# Altium PCB Q1_STM32_Buck.PcbDoc
Units mm, origin at the board's own origin, x right, y up, seen from the top; angles counter-clockwise.
Board outline 59 x 35 mm, 4 copper layers (Top Layer, Int1 (GND), Int2 (GND), Bottom Layer), stack 1.369 mm thick; 39 components, 22 nets, 158 pads, 34 vias.
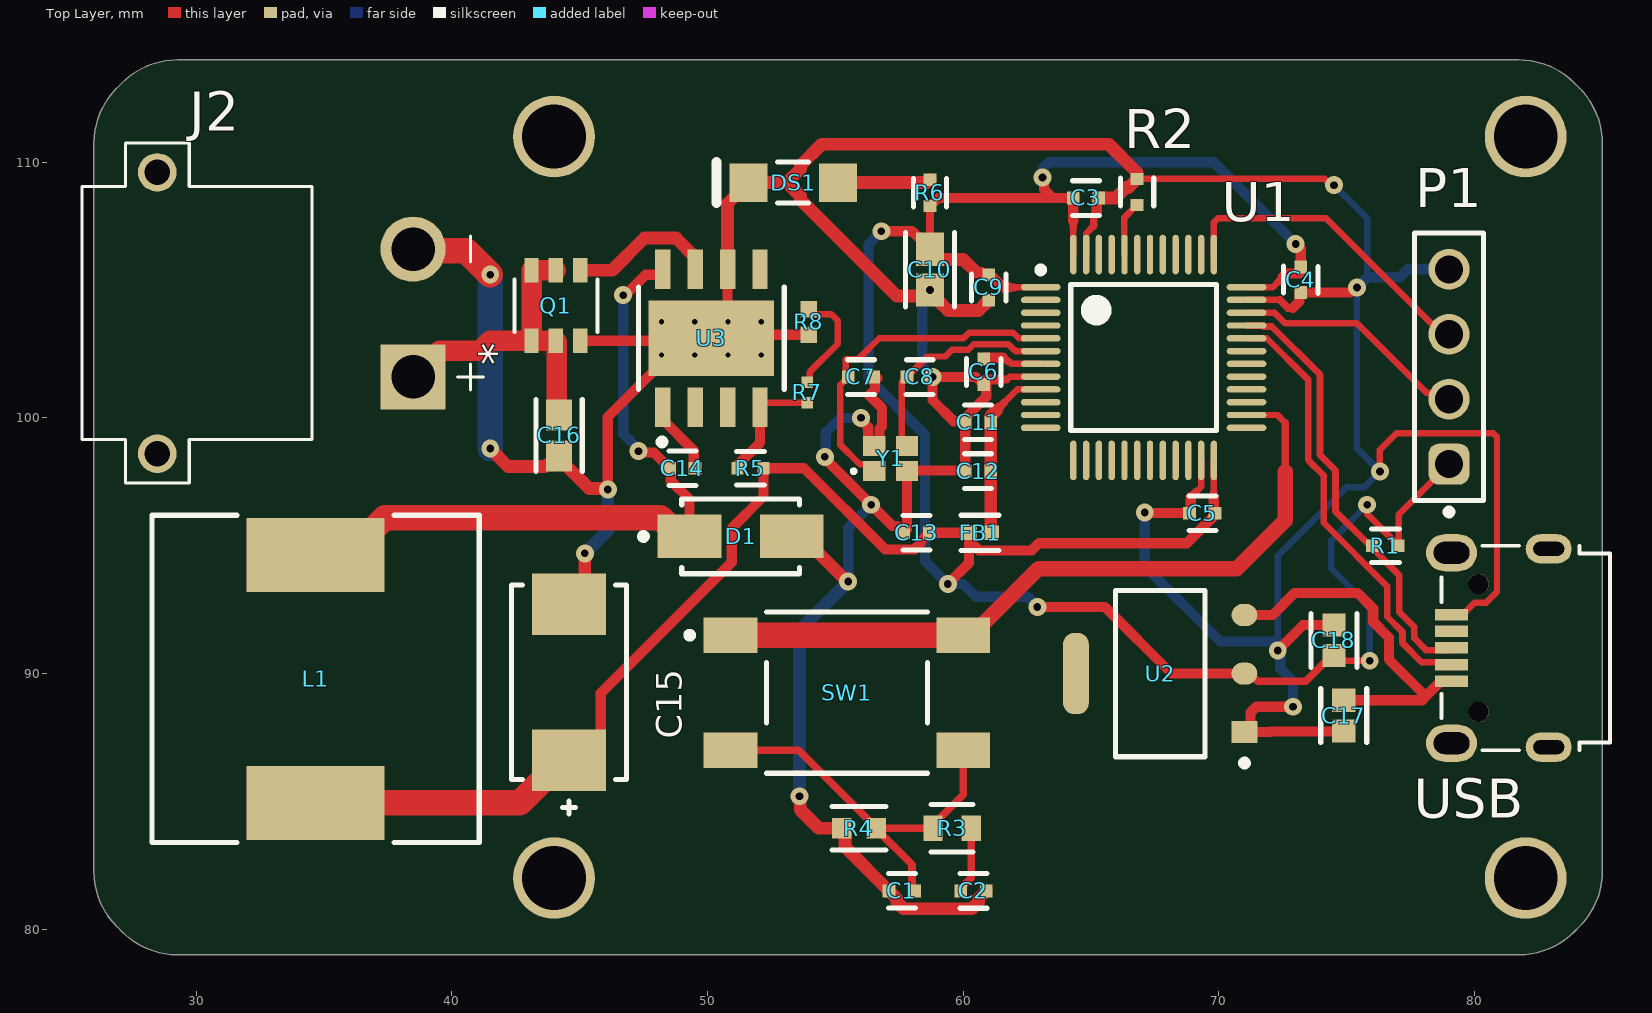
[diagram p0: Top Layer view]
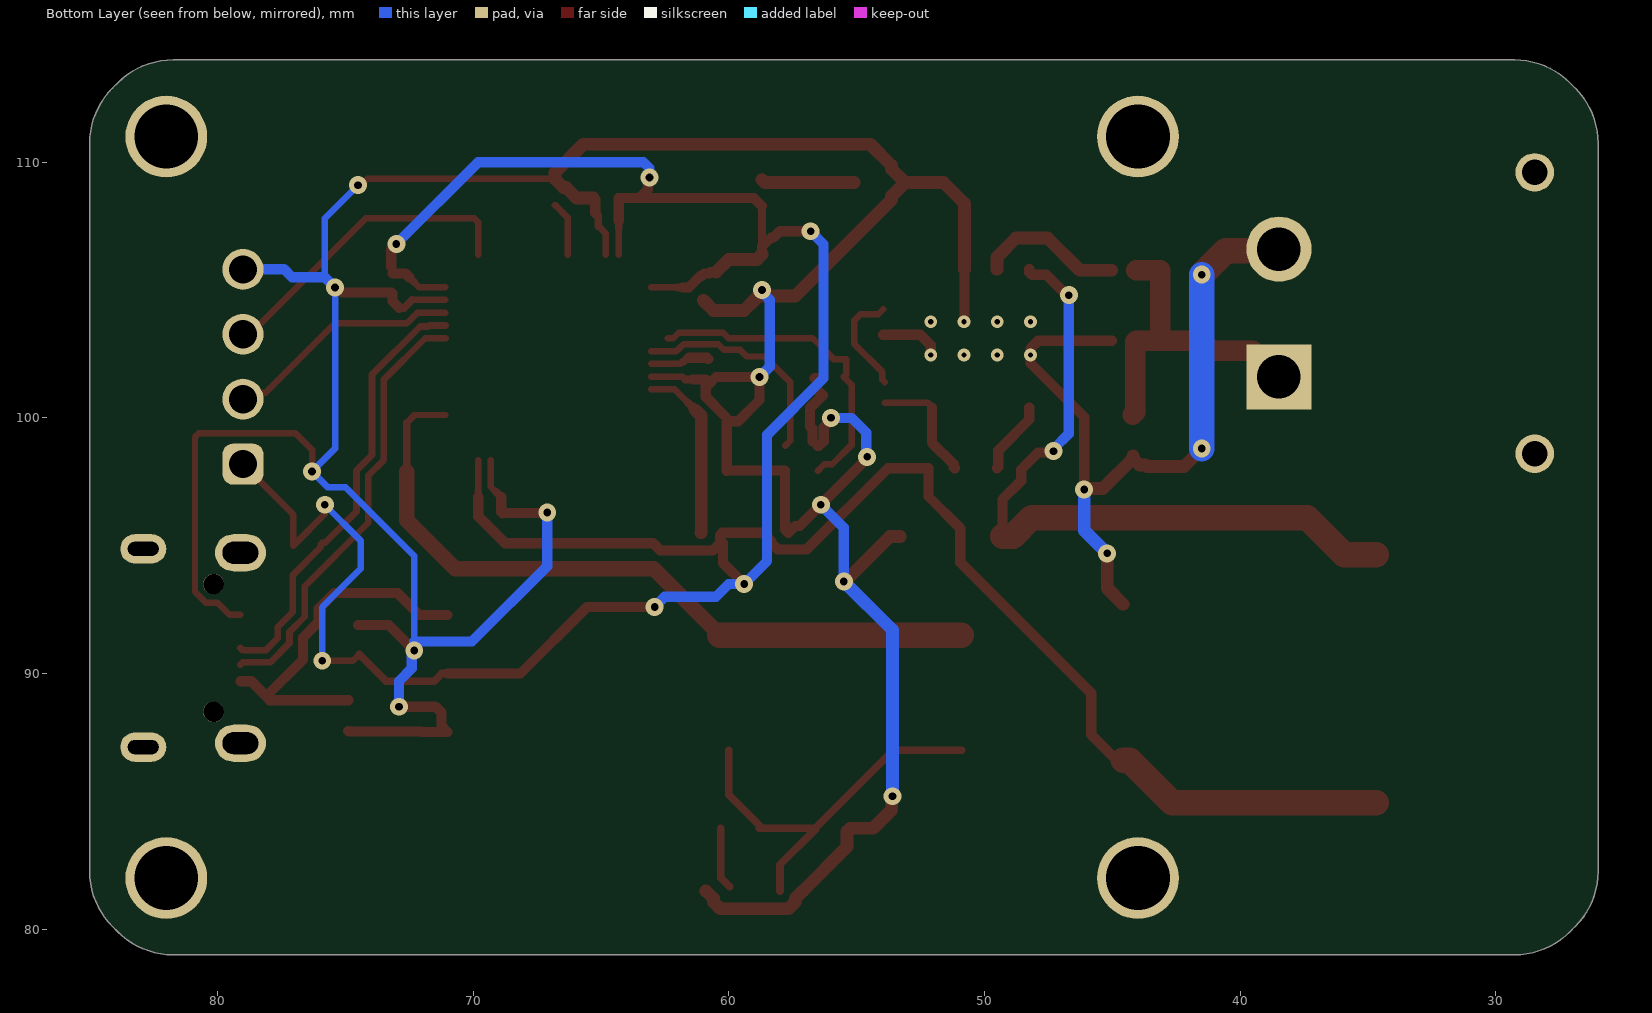
[diagram p1: Bottom Layer view, seen from below]
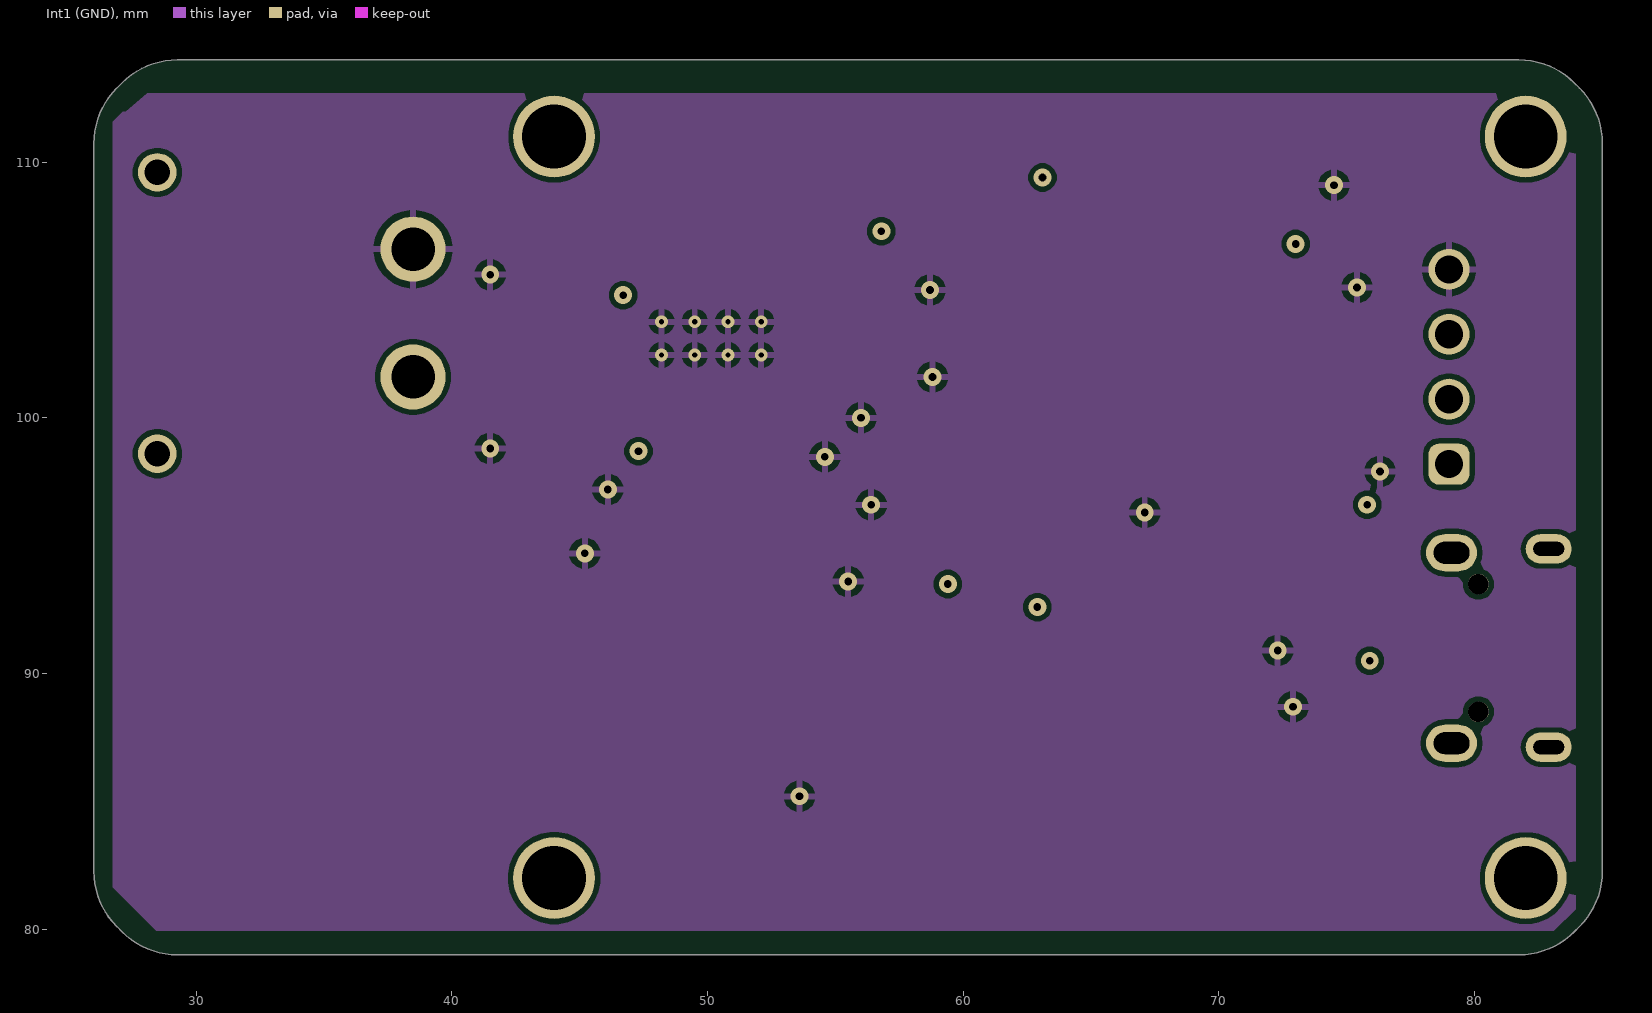
[diagram p2: Int1 (GND)]
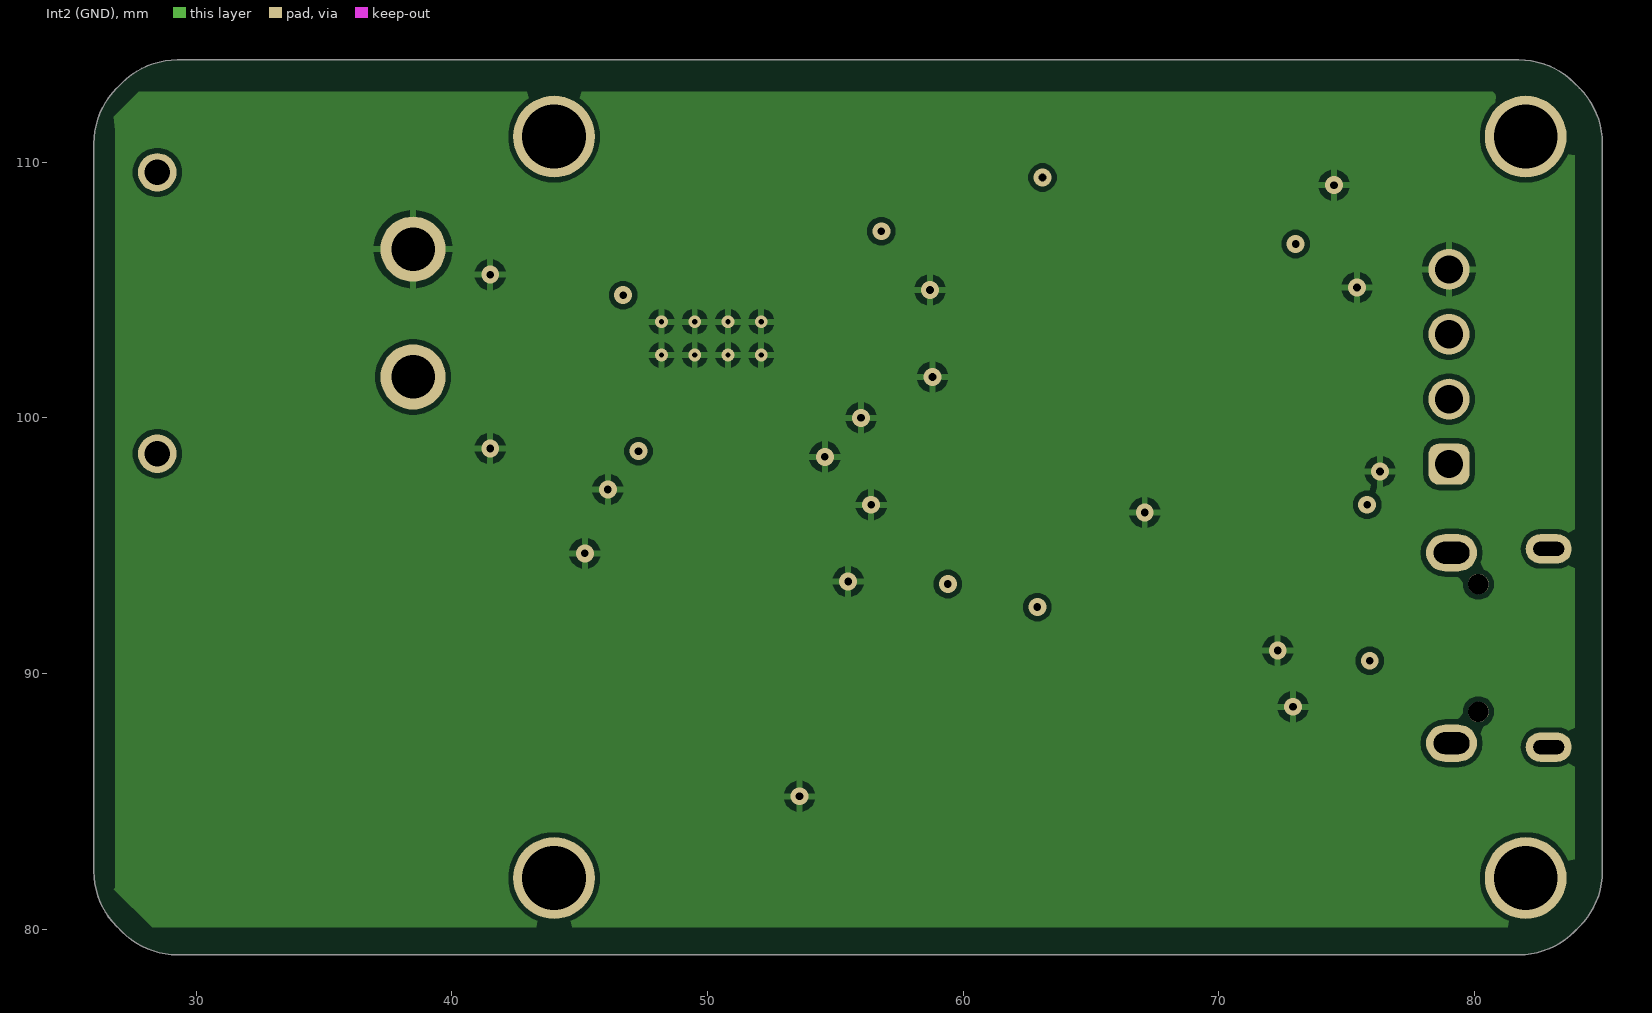
[diagram p3: Int2 (GND)]
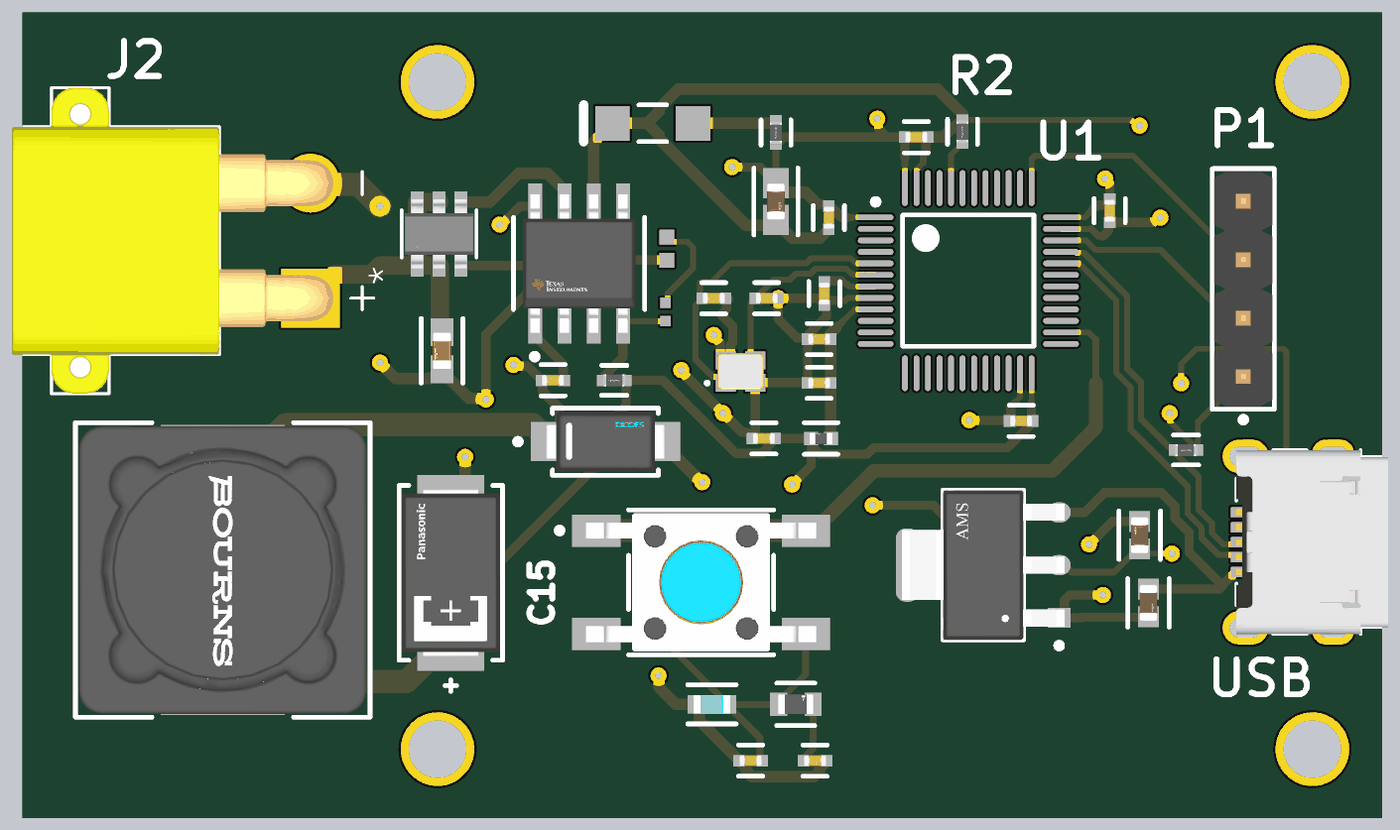
[diagram p4: 3D render of the assembled board from above, using the file's embedded part models]

## Layer stack, top to bottom
Top Solder: solder mask 0.0254, SM-001, Dk 4
Top Layer: signal copper 0.035
Dielectric 1: prepreg 0.1295, PP-017, Dk 4.3
Dielectric 2: prepreg 0.1295, PP-017, Dk 4.3
Int1 (GND): signal copper 0.035
Dielectric 3: core 0.7112, Core-039, Dk 4.8
Int2 (GND): signal copper 0.035
Dielectric 4: prepreg 0.1295, PP-017, Dk 4.3
Dielectric 5: prepreg 0.1295, PP-017, Dk 4.3
Bottom Layer: signal copper 0.035
Bottom Solder: solder mask 0.0254, SM-001, Dk 4

## Board outline
26.898,80.102 cw(c29.066,82.27) 26,82.27 26,110.73 cw(c29.066,110.73) 26.898,112.898 27.102,113.102 cw(c29.27,110.934) 29.27,114 81.73,114 cw(c81.73,110.934) 83.898,113.102 84.102,112.898 cw(c81.934,110.73) 85,110.73 85,82.27 cw(c81.934,82.27) 84.102,80.102 83.898,79.898 cw(c81.73,82.066) 81.73,79 29.27,79 cw(c29.27,82.066) 27.102,79.898

## Design rules (kind name [scope] priority, off if disabled: settings)
Clearance [All] p1: gap=0.2 ignorepadtopadclearanceinfootprint=FALSE
DiffPairsRouting [All] p1: maxlimit=0.254 minlimit=0.203 mostfreqgap=0.254 toplayer_prefgap=0.203 toplayer_minwidth=0.26 toplayer_maxwidth=0.381 toplayer_prefwidth=0.26 midlayer1_mingap=0.254 midlayer1_minwidth=0.381 midlayer1_maxwidth=0.381 midlayer1_prefwidth=0.381 midlayer2_mingap=0.254 midlayer2_minwidth=0.381 midlayer2_maxwidth=0.381 midlayer2_prefwidth=0.381 bottomlayer_prefgap=0.203 bottomlayer_minwidth=0.26 bottomlayer_maxwidth=0.381 bottomlayer_prefwidth=0.26 maxuncoupledlength=12.7
PolygonConnect [All] p1: connectstyle=Relief reliefconductorwidth=0.254 reliefentries=4 polygonreliefangle="90 Angle" airgapwidth=0.254
RoutingVias [All] p1: holewidth=0.3 width=0.7 viastyle="Through Hole" minholewidth=0.25 minwidth=0.55 maxholewidth=0.4 maxwidth=0.9
SolderMaskExpansion [All] p1: expansion=0.102 istentingtop=FALSE
SupplyNets "Schematic Supply Nets_4" [InNet('GND')] p1: voltage=0.000
SupplyNets "Schematic Supply Nets_3" [InNet('+12')] p2: voltage=0.000
SupplyNets "Schematic Supply Nets_2" [InNet('VBUS')] p3: voltage=0.000
SupplyNets "Schematic Supply Nets_1" [InNet('3V3A')] p4: voltage=0.000
SupplyNets "Schematic Supply Nets" [InNet('+3V3')] p5: voltage=0.000
Width [All] p1: maxlimit=1 minlimit=0.254 preferedwidth=0.254 midlayer1_maxwidth=0.254 midlayer2_maxwidth=0.254 minimp=50.000000 maximp=50.000000 favimp=50.000000
29 further rules are at their usual default settings.

## Classes and differential pairs
component class Q1_STM32_Buck_PWR_Supply: C14 C15 C16 D1 DS1 L1 Q1 R5 R6 R7 R8 U3 XT30
component class Q1_STM32_Buck_MCU: C1 C2 C3 C4 C5 C6 C7 C8 C9 C10 C11 C12 C13 C17 C18 FB1 P1 R1 R2 R3 R4 SW1 U1 U2 USB Y1
differential pair MCU_USB_D: +MCU_USB_D_P -MCU_USB_D_N

## Components (designator, comment, footprint, x,y, rotation, side; value= is the part's Value field where it differs from the comment)
C1 "10pF" FP-CC0402-MFG 57.6,81.5 r180 top value="10 pF"
C2 "100nF" FP-CC0402-MFG 60.4,81.5 r0 top value="100 nF"
C3 "100nF" FP-CC0402-MFG 64.8,108.6 r0 top value="100 nF"
C4 "100nF" FP-CC0402-MFG 73.2,105.4 r270 top value="100 nF"
C5 "100nF" FP-CC0402-MFG 69.35,96.266 r180 top value="100 nF"
C6 "100nF" FP-CC0402-MFG 60.8,101.8 r90 top value="100 nF"
C7 "10pF" FP-CC0402-MFG 56,101.6 r0 top value="10 pF"
C8 "10pF" FP-CC0402-MFG 58.3,101.6 r0 top value="10 pF"
C9 "100nF" FP-CC0402-MFG 61,105.1 r270 top value="100 nF"
C10 "4.7uF" FP-GRM188-0_2-IPC_A 58.7,105.801 r270 top
C11 "10nF" FP-CC0402-MFG 60.579,99.822 r180 top value="10 nF"
C12 "1uF" FP-CC0402-MFG 60.579,97.917 r180 top
C13 "1uF" FP-CC0402-MFG 58.174,95.504 r180 top
C14 "10nF" FP-CC0402-MFG 49.015,98.029 r180 top value="10 nF"
C15 "220uF" FP-POSCAP-D4-MFG 44.577,89.662 r270 top
C16 "10uF" FP-GRM188-0_1-e0_2_0_55-IPC_A 44.196,99.314 r270 top
C17 "22uF" FP-GRM188-0_2-IPC_C 74.882,88.358 r270 top
C18 "22uF" FP-GRM188-0_2-IPC_C 74.5,91.3 r90 top
D1 "B340" FP-SMA-MFG 51.293,95.362 r0 top
DS1 "PWR_Status" AVAG-HSMX-C150_V 53.35,109.2 r180 top
FB1 "120R" FP-BLM15-0_05-IPC_B 60.658,95.504 r180 top
J2 "XT30PW-M" AMASS_XT30PW-M 28.481,104.1 r90 top
L1 "15uH" FP-SRR1260-MFG 34.671,89.789 r270 top
P1 "SWD" 61300411121 79,102 r90 top
Q1 "RQ6G050ATTCR" SOT-457T_SC-95_ROM 44.069,104.394 r90 top
R1 "1.5k" FP-ERA2A-MFG 76.512,95 r180 top value=1.5kΩ
R2 "10k" FP-ERA2A-MFG 66.802,108.835 r90 top value=10kΩ
R3 "1K" FP-RCA0603-e3-MFG 59.563,83.947 r0 top
R4 "100K" FP-RK73H1J-IPC_C 55.92,83.947 r0 top
R5 "10k" FP-ERA2A-MFG 51.678,98.029 r180 top value=10kΩ
R6 "1.5k" FP-ERA2A-MFG 58.7,108.8 r90 top value=1.5kΩ
R7 "5.6K" RESC1005X40X25LL05T05 53.9,101 r270 top
R8 "270" RESC1005X40X25ML05T05 53.96,103.752 r90 top
SW1 "Push Button" FP-1977223-1-MFG 55.45,89.25 r180 top
U1 "STM32F103C8T6" STM-LQFP48_L 67.056,102.362 r0 top
U2 "AMS1117-3.3" FP-AMS1117-IPC_C 67.705,90 r180 top
U3 "TPS5430DDA" FP-DDA0008J-MFG 50.15,103.109 r90 top
USB "USB_Micro_B" 629105150521 82,91 r90 top (schematic designator J1)
Y1 "16MHz" WE-XTAL_IQXC-42 57.162,98.413 r0 top

## Footprints (in the part's own frame and the unit in brackets; to place one, negate y for a bottom-side part, rotate by r counter-clockwise, add the part's x,y. Pads: shape width x height; smd on the part's side, far side on the other; paste and mask are expansions set on the pad)
61300411121 [mm] "Pin Header, pitch 2.54 mm, THT, Vertical, single row, 4p"
  rrect50% 1.6x1.6 hole 1.1: 1(-3.81,0)
  round 1.6 hole 1.1: 2(-1.27,0) 3(1.27,0) 4(3.81,0)
  silkscreen extent -5.8,-1.35 5.23,1.35, body extent -5.08,-1.27 5.08,1.27, height 8.57
629105150521 [mm] "Micro USB 2.0 SMT Type B Horizontal 5 Contacts High Current"
  rect 0.45x1.3 smd: 1(-1.3,2.9) 2(-0.65,2.9) 3(0,2.9) 4(0.65,2.9) 5(1.3,2.9)
  round 0.8 hole 0.8 unplated: MH1(-2.5,1.85) MH2(2.5,1.85)
  oval 1.15x1.8 hole 0.55 slot 1.2 at 90 deg: Shell(-3.875,-0.9) Shell(3.875,-0.9)
  oval 1.45x2 hole 0.85 slot 1.4 at 90 deg: Shell(-3.725,2.9) Shell(3.725,2.9)
  silkscreen extent -4,-3.3 4,3.3, body extent -4,-3.3 4,3.3, height 2.75
AMASS_XT30PW-M [mm]
  round 2.55 hole 1.7: N(2.5,-10)
  rect 2.55x2.55 / inner round 2.55 / far side rect 2.55x2.55 hole 1.7: P(-2.5,-10)
  round 1.508 hole 1: S1(5.5,0) S2(-5.5,0)
  silkscreen extent -6.65,-12.75 6.65,2.95, body extent -6.65,-11 6.65,2.95, height 5
AVAG-HSMX-C150_V [mm] "SMD, 2-Leads, Body 3.2x1.6mm"
  rect 1.5x1.5 smd: 1(-1.75,0) 2(1.75,0)
  silkscreen extent -0.6,-0.8 3,0.8, body extent -1.6,-0.8 1.6,0.8, height 1.1
FP-1977223-1-MFG [mm]
  rect 2.1x1.4 smd paste+0 mask+0: 1(4.55,-2.25) 2(-4.55,-2.25) 3(4.55,2.25) 4(-4.55,2.25)
  silkscreen extent -3.15,-3.15 6.27,3.15, body extent -5.7,-3.25 5.7,3.25, height 0.25
FP-AMS1117-IPC_C [mm]
  rect 1.004x0.872 smd paste+0 mask+0: 1(-3.295,2.29)
  rrect100% 1.004x0.872 smd paste+0 mask+0: 2(-3.295,0) 3(-3.295,-2.29)
  rrect87% 1.004x3.182 smd paste+0 mask+0: 4(3.295,0)
  silkscreen extent -3.42,-3.25 1.75,3.62, body extent -3.9,-3.35 3.9,3.35, height 0.25
FP-BLM15-0_05-IPC_B [mm]
  rect 0.615x0.572 smd paste+0 mask+0: 1(-0.429,0) 2(0.429,0)
  silkscreen extent -0.74,-0.69 0.74,0.69, body extent -0.89,-0.44 0.89,0.44, height 0.25
FP-CC0402-MFG [mm]
  rect 0.5x0.5 smd paste+0 mask+0: 1(-0.5,0) 2(0.5,0)
  silkscreen extent -0.53,-0.68 0.53,0.67, body extent -0.87,-0.48 0.87,0.48, height 0.25
FP-DDA0008J-MFG [mm]
  rect 1.55x0.6 smd paste+0 mask+0: 1(-2.7,1.905) 2(-2.7,0.635) 3(-2.7,-0.635) 4(-2.7,-1.905) 5(2.7,-1.905) 6(2.7,-0.635) 7(2.7,0.635) 8(2.7,1.905)
  rect 2.95x4.9 smd paste-1000 mask-1000: 9(0,0)
  silkscreen extent -4.17,-2.85 2,2.85, body extent -3.57,-2.75 3.57,2.75, height 0.25
FP-ERA2A-MFG [mm]
  rect 0.475x0.5 smd paste+0 mask+0: 1(-0.512,0) 2(0.512,0)
  silkscreen extent -0.55,-0.65 0.55,0.65, body extent -0.85,-0.4 0.85,0.4, height 0.25
FP-GRM188-0_1-e0_2_0_55-IPC_A [mm]
  rect 1.208x1.012 smd paste+0 mask+0: 1(-0.802,0) 2(0.802,0)
  silkscreen extent -1.41,-0.91 1.41,0.91, body extent -1.91,-1.01 1.91,1.01, height 0.25
FP-GRM188-0_2-IPC_A [mm]
  rect 1.305x1.106 smd paste+0 mask+0: 1(-0.801,0) 2(0.801,0)
  silkscreen extent -1.45,-0.95 1.45,0.95, body extent -1.95,-1.05 1.95,1.05, height 0.25
FP-GRM188-0_2-IPC_C [mm]
  rect 0.905x0.906 smd paste+0 mask+0: 1(-0.601,0) 2(0.601,0)
  silkscreen extent -1.05,-0.9 1.05,0.9, body extent -1.15,-0.6 1.15,0.6, height 0.25
FP-POSCAP-D4-MFG [mm]
  rect 2.4x2.9 smd paste+0 mask+0: 1(-3.05,0) 2(3.05,0)
  silkscreen extent -3.8,-2.25 5.15,2.25, body extent -4.35,-2.35 4.35,2.35, height 0.25
FP-RCA0603-e3-MFG [mm]
  rect 0.75x1 smd paste+0 mask+0: 1(-0.75,0) 2(0.75,0)
  silkscreen extent -0.83,-0.92 0.82,0.92, body extent -1.22,-0.6 1.22,0.6, height 0.25
FP-RK73H1J-IPC_C [mm]
  rect 0.756x0.812 smd paste+0 mask+0: 1(-0.675,0) 2(0.675,0)
  silkscreen extent -1.05,-0.85 1.05,0.85, body extent -1.15,-0.55 1.15,0.55, height 0.25
FP-SMA-MFG [mm]
  rect 2.5x1.7 smd paste+0 mask+0: 1(-2,0) 2(2,0)
  silkscreen extent -3.92,-1.46 2.3,1.46, body extent -3.35,-1.56 3.35,1.56, height 0.25
FP-SRR1260-MFG [mm]
  rect 2.9x5.4 smd paste+0 mask+0: 1(-4.85,0) 2(4.85,0)
  silkscreen extent -6.4,-6.4 6.4,6.4, body extent -6.5,-6.5 6.5,6.5, height 0.25
RESC1005X40X25LL05T05 [mm] "Chip Resistor, 2-Leads, Body 1.00x0.50mm, IPC High Density"
  rect 0.45x0.45 smd: 1(-0.4,0) 2(0.4,0)
  body extent -0.53,-0.27 0.53,0.28, height 0.4
RESC1005X40X25ML05T05 [mm] "Chip Resistor, 2-Leads, Body 1.00x0.50mm, IPC Low Density"
  rect 0.65x0.65 smd: 1(-0.5,0) 2(0.5,0)
  body extent -0.53,-0.27 0.53,0.28, height 0.4
SOT-457T_SC-95_ROM [mil]
  rect 37.5x22 smd paste+0 mask+0: 1(-54.25,37.4) 2(-54.25,0) 3(-54.25,-37.4) 4(54.25,-37.4) 5(54.25,0) 6(54.25,37.4)
  silkscreen extent -41,-64 41,64, body extent -59,-59 59,59, height 39
STM-LQFP48_L [mm] "QFP, 48-Leads, Body 7x7mm, Pitch 0.5mm, IPC High Density"
  oval 1.55x0.25 smd: 1(-4.025,2.75) 2(-4.025,2.25) 3(-4.025,1.75) 4(-4.025,1.25) 5(-4.025,0.75) 6(-4.025,0.25) 7(-4.025,-0.25) 8(-4.025,-0.75) 9(-4.025,-1.25) 10(-4.025,-1.75) 11(-4.025,-2.25) 12(-4.025,-2.75) 25(4.025,-2.75) 26(4.025,-2.25) 27(4.025,-1.75) 28(4.025,-1.25) 29(4.025,-0.75) 30(4.025,-0.25) 31(4.025,0.25) 32(4.025,0.75) 33(4.025,1.25) 34(4.025,1.75) 35(4.025,2.25) 36(4.025,2.75)
  oval 0.25x1.55 smd: 13(-2.75,-4.025) 14(-2.25,-4.025) 15(-1.75,-4.025) 16(-1.25,-4.025) 17(-0.75,-4.025) 18(-0.25,-4.025) 19(0.25,-4.025) 20(0.75,-4.025) 21(1.25,-4.025) 22(1.75,-4.025) 23(2.25,-4.025) 24(2.75,-4.025) 37(2.75,4.025) 38(2.25,4.025) 39(1.75,4.025) 40(1.25,4.025) 41(0.75,4.025) 42(0.25,4.025) 43(-0.25,4.025) 44(-0.75,4.025) 45(-1.25,4.025) 46(-1.75,4.025) 47(-2.25,4.025) 48(-2.75,4.025)
  silkscreen extent -4.15,-2.85 2.85,3.55, body extent -3.5,-3.5 3.5,3.5, height 1.6
WE-XTAL_IQXC-42 [mm] "Quartz Crystal, size IQXC-42, body 2x1.6mm"
  rect 0.875x0.775 smd: 1(-0.637,-0.487) 2(0.638,-0.487) 3(0.638,0.487) 4(-0.637,0.487)
  silkscreen extent -1.52,-0.57 -1.37,-0.43, body extent -1,-0.8 1,0.8, height 0.5

## Part data
C1 C7 C8: library part CMP-03422-001312-1, "CAP CER 0.1UF 16V X5R 0402", Capacitance="10 pF", Manufacturer=YAGEO, Manufacturer Part Number=CC0402MRX5R7BB104, Package=CC0402, Temperature="-55°C to +125°C", Temperature Characteristic=X5R, Temperature Coefficient=30ppm/°C, Temperature Range High=+125°C, Temperature Range Low=-55°C, Tolerance=0.2, Voltage Rating="16 V", Automotive=No, Automotive Grade=NA, Category=Cap, ComponentLink2Description=Datasheet, ComponentLink2URL=http://www.yageo.com/documents/recent/UPY-GP_NP0_16V-to-50V_16.pdf, Device Class L1="Passive Components", Device Class L2=Capacitors, Device Class L3="Ceramic Capacitors", Digikey Description="CAP CER 0.1UF 16V X5R 0402", Footprint Url=http://www.yageo.com/exep/pages/download/literatures/UPY-C_GEN_24.pdf, Height=0.55mm, Ipc Land Pattern Name=CAPC10050X50, Lead Free=Yes, Material=Ceramic, Mouser Description="Multilayer Ceramic Capacitors MLCC - SMD/SMT 100nF 16V X5R 20%", Octopart=https://octopart.com/cc0402mrx5r7bb104-yageo-33242280, RoHS=TRUE
C2 C3 C4 C5 C6 C9: library part CMP-03422-001312-1, "CAP CER 0.1UF 16V X5R 0402", Capacitance="100 nF", Manufacturer=YAGEO, Manufacturer Part Number=CC0402MRX5R7BB104, Package=CC0402, Temperature="-55°C to +125°C", Temperature Characteristic=X5R, Temperature Coefficient=30ppm/°C, Temperature Range High=+125°C, Temperature Range Low=-55°C, Tolerance=0.2, Voltage Rating="16 V", Automotive=No, Automotive Grade=NA, Category=Cap, ComponentLink2Description=Datasheet, ComponentLink2URL=http://www.yageo.com/documents/recent/UPY-GP_NP0_16V-to-50V_16.pdf, Device Class L1="Passive Components", Device Class L2=Capacitors, Device Class L3="Ceramic Capacitors", Digikey Description="CAP CER 0.1UF 16V X5R 0402", Footprint Url=http://www.yageo.com/exep/pages/download/literatures/UPY-C_GEN_24.pdf, Height=0.55mm, Ipc Land Pattern Name=CAPC10050X50, Lead Free=Yes, Material=Ceramic, Mouser Description="Multilayer Ceramic Capacitors MLCC - SMD/SMT 100nF 16V X5R 20%", Octopart=https://octopart.com/cc0402mrx5r7bb104-yageo-33242280, RoHS=TRUE
C10: library part CMP-06035-002362-1, "Chip Multilayer Ceramic Capacitors for General Purpose, 0603, 4.7uF, X7S, 22%, 10%, 16V", Dielectric=X7S, Tolerance=10%, Voltage Rating (DC)=16V, Capacitance=4.7uF, Length=1.6mm, Thickness=800um, Width=800um
C11 C14: library part CMP-03422-001312-1, "CAP CER 0.1UF 16V X5R 0402", Capacitance="10 nF", Manufacturer=YAGEO, Manufacturer Part Number=CC0402MRX5R7BB104, Package=CC0402, Temperature="-55°C to +125°C", Temperature Characteristic=X5R, Temperature Coefficient=30ppm/°C, Temperature Range High=+125°C, Temperature Range Low=-55°C, Tolerance=0.2, Voltage Rating="16 V", Automotive=No, Automotive Grade=NA, Category=Cap, ComponentLink2Description=Datasheet, ComponentLink2URL=http://www.yageo.com/documents/recent/UPY-GP_NP0_16V-to-50V_16.pdf, Device Class L1="Passive Components", Device Class L2=Capacitors, Device Class L3="Ceramic Capacitors", Digikey Description="CAP CER 0.1UF 16V X5R 0402", Footprint Url=http://www.yageo.com/exep/pages/download/literatures/UPY-C_GEN_24.pdf, Height=0.55mm, Ipc Land Pattern Name=CAPC10050X50, Lead Free=Yes, Material=Ceramic, Mouser Description="Multilayer Ceramic Capacitors MLCC - SMD/SMT 100nF 16V X5R 20%", Octopart=https://octopart.com/cc0402mrx5r7bb104-yageo-33242280, RoHS=TRUE
C12 C13: library part CMP-03422-001312-1, "CAP CER 0.1UF 16V X5R 0402", Manufacturer=YAGEO, Manufacturer Part Number=CC0402MRX5R7BB104, Package=CC0402, Temperature="-55°C to +125°C", Temperature Characteristic=X5R, Temperature Coefficient=30ppm/°C, Temperature Range High=+125°C, Temperature Range Low=-55°C, Tolerance=0.2, Voltage Rating="16 V", Automotive=No, Automotive Grade=NA, Capacitance=1uF, Category=Cap, ComponentLink2Description=Datasheet, ComponentLink2URL=http://www.yageo.com/documents/recent/UPY-GP_NP0_16V-to-50V_16.pdf, Device Class L1="Passive Components", Device Class L2=Capacitors, Device Class L3="Ceramic Capacitors", Digikey Description="CAP CER 0.1UF 16V X5R 0402", Footprint Url=http://www.yageo.com/exep/pages/download/literatures/UPY-C_GEN_24.pdf, Height=0.55mm, Ipc Land Pattern Name=CAPC10050X50, Lead Free=Yes, Material=Ceramic, Mouser Description="Multilayer Ceramic Capacitors MLCC - SMD/SMT 100nF 16V X5R 20%", Octopart=https://octopart.com/cc0402mrx5r7bb104-yageo-33242280, RoHS=TRUE
C15: library part CMP-05428-000943-1, "Molded Tantalum Polymer Capacitor 220uF 20% 10V life 2000Hours SMD 2917", Case Code (Imperial)=2917, Case Code (Metric)=7343, ESR (Equivalent Series Resistance)=40mR, Leakage Current=220uA, Max Operating Temperature=105°C, Min Operating Temperature=-55°C, Package Quantity=2000, Ripple Current=3A, Tolerance=20%, Voltage=10V, Capacitance=220uF, Case/Package=2917, Construction=Flat, Depth=4.3mm, Dissipation Factor=10%, Features="General Purpose", Height=3.8mm, Height - Seated (Max)=0.118inch, Lead Free="Lead Free", Length=7.3mm, Material=Polymer, Mount="Surface Mount", Number of Pins=4, Packaging="Tape and Reel", Polarity=Polar, Radiation Hardening=No, REACH SVHC="No SVHC", RoHS Compliant=Yes, Series="POSCAP™ TPB", Termination=SMD/SMT, Voltage Rating=10V, Voltage Rating (DC)=10V, Width=4.3mm
C16: library part CMP-2006-02792-2, "Chip Multilayer Ceramic Capacitors for General Purpose, 0603, 10uF, X5R, 15%, 20%, 6.3V", Case Code (Imperial)=0603, Case Code (Metric)=1608, Dielectric=X5R, Max Operating Temperature=85°C, Min Operating Temperature=-55°C, Package Quantity=4000, Tolerance=20%, Voltage=6.3V, Capacitance=10uF, Case/Package=0603, Depth=0.8mm, Height=0.8mm, Lead Free="Lead Free", Length=1.6mm, Material=Ceramic, Mount="Surface Mount", Packaging="Tape and Reel", Radiation Hardening=No, REACH SVHC="No SVHC", Termination=SMD/SMT, Thickness=0.035inch, Voltage Rating=6.3V, Voltage Rating (DC)=6.3V, Width=0.031inch
C17 C18: library part CMP-2000-06337-3, "Chip Multilayer Ceramic Capacitors for General Purpose, 0603, 22uF, X5R, 15%, 20%, 10V", Case Code (Imperial)=0603, Case Code (Metric)=1608, Dielectric=X5R, Max Operating Temperature=85°C, Min Operating Temperature=-55°C, Package Quantity=4000, Tolerance=20%, Voltage Rating=10V, Capacitance=22uF, Case/Package=0603, Depth=0.8mm, Height=0.8mm, Lead Free="Lead Free", Length=1.6mm, Material=Ceramic, Mount="Surface Mount", Packaging="Tape and Reel", REACH SVHC="No SVHC", Termination=SMD/SMT, Thickness=0.039inch, Voltage Rating (DC)=10V, Weight=0.000222oz, Width=0.8mm
D1: library part CMP-1667-00003-3, "DIODE SCHOTTKY 40V 3A SMA", Average Rectified Current=3A, Capacitance=250pF, Case/Package=SMA, Forward Voltage=500mV, Max Forward Surge Current (Ifsm)=80A, Max Operating Temperature=125°C, Max Repetitive Reverse Voltage (Vrrm)=40V, Max Reverse Current=500uA, Min Operating Temperature=-55°C, Package Quantity=5000, Contact Plating=Tin, Current=3A, Current Rating=3A, Element Configuration=Single, Forward Current=3A, Height=2.3mm, Lead Free="Lead Free", Length=4.6mm, Max Reverse Voltage (DC)=40V, Mount="Surface Mount", Number of Pins=2, Output Current=3A, Packaging="Tape and Reel", Peak Non-Repetitive Surge Current=80A, Polarity=Standard, Radiation Hardening=No, REACH SVHC="No SVHC", RoHS Compliant=Yes, Series=-, Termination=SMD/SMT, Voltage=40V, Voltage Rating (DC)=40V, Weight=0.002258oz, Width=2.92mm
DS1: library part CMP-2000-06426-1, "LED Uni-Color Red, 65 mW, 25 mA, -40 to 85 degC, 2-Pin SMD, RoHS, Tape and Reel", Emitting Color=Red, Forward Current=25mA, Forward Voltage=2.6V, Manufacturer=Avago, Operating Temp Range=-40Cto85C, Operating Temperature Classification=Industrial, Package Description="2-Pin Surface Mount Device, Body 3.2 x 1.6 mm", Package Reference=HSMX-C150, Package Type=ChipLed, Power Dissipation=78W, Reverse Voltage=5V, Test Current (It)=20mA, Chip Material=GaAlAs, Datasheet URL=http://media.digikey.com/pdf/Data%20Sheets/Avago%20PDFs/HSMz-Czzz.pdf, Datasheet Version=03/2012, DELETED=Compliant, Dominant Wave Length=639nm, High Brightness=No, Lens Dimensions=2x1.6x0.6mm, Lens Type=ColorlessDiffused, Lum Intensity=17mcd, Luminous Intensity=17mcd, Main Category=ChipLED, Manufacturer URL=http://www.avagotech.com/, Mounting=SurfaceMount, Mounting Technology=SurfaceMount, Number of  Elements=1, Packaging=TapeandReel, Peak Wavelength=660nm, Pin Count=2, Product Depth (mm)=1.6mm, Product Height (mm)=1.1mm, Product Length (mm)=3.2mm, Rad Hardened=No, Shape Type=Rectangular, Type=Uni-Color, Viewing Angle=170deg
FB1: library part CMP-0686-00181-5, "Chip Ferrite Bead, 0402, 1000Ω @ 100MHz, 0.65Ω, 25%, 300mA", Case Code (Imperial)=0402, Case Code (Metric)=1005, Current Rating=300mA, DC Current=200mA, DC Resistance (DCR)=650mR, DC Resistance-Max=1R, Frequency=100MHz, Max Operating Temperature=125°C, Min Operating Temperature=-55°C, Package Quantity=1, Tolerance=25%, Case/Package=0402, Core Material=Ferrite, Depth=0.55mm, Height=0.5mm, Impedance=120, Lead Free="Lead Free", Length=1mm, Material=Ferrite, Max Current Rating=300mA, Max DC Current=200mA, Military Standard=Not, Number of Circuits=1, Number of Lines=1, Number of Pins=2, Packaging="Tape and Reel", Radiation Hardening=No, REACH SVHC="No SVHC", RoHS Compliant=Yes, Series=BLM15AG_SN, Shielding=Unshielded, Termination=SMD/SMT, Test Frequency=100MHz, Width=0.5mm
J2: "Socket; DC supply; XT30; male; PIN: 2; on PCBs; THT; Colour: yellow", Package=None, Check_prices=https://www.snapeda.com/parts/XT30PW-M/AMASS/view-part/?ref=eda, MF=AMASS, MP=XT30PW-M, SnapEDA_Link=https://www.snapeda.com/parts/XT30PW-M/AMASS/view-part/?ref=snap
L1: library part CMP-2000-07146-2, "FIXED IND 15UH 5A 27 MOHM SMD", Case/Package=1260, Current Rating=5A, DC Resistance (DCR)=27mR, Frequency=17.6MHz, Inductance Tolerance=20%, Max Operating Temperature=125°C, Min Operating Temperature=-40°C, Package Quantity=600, Resistance=27MR, Resistor Type=Wirewound, Saturation Current=4.6A, Test Frequency=100kHz, Core Material=Ferrite, DC Current=5A, Depth=12.8mm, Height=6mm, Height - Seated (Max)=0.256inch, Inductance=15uH, Length=12.5mm, Material=Steel, Max DC Current=5A, Military Standard=Not, Mount="Surface Mount", Number of Pins=2, Packaging="Tape and Reel", Q Factor=25, REACH SVHC="No SVHC", RMS Current (Irms)=5A, RoHS Compliant=Yes, Sample Rate (Hz)=100kHz, Self Resonant Frequency=17.6MHz, Series=SRR1260, Shielding=Shielded, Termination=SMD/SMT, Tolerance=20%, Width=12.5mm
P1: library part CMP-1502-01064-3, Color=Black, Contact Resistance=20mΩ, Current Rating=3A, Max Operating Temperature=105°C, Min Operating Temperature=-40°C, Operating Supply Voltage=250V, Connector Type="Male Pin", Contact Material=Copper, Contact Mating Length=5.9944mm, Contact Plating=Gold, Gender=Male, Height=8.89mm, Lead Free="Lead Free", Lead Pitch=2.54mm, Mount="Through Hole", NexarPartId=32855522, Number of Contacts=4, Number of Pins=4, Number of Positions=4, Number of Rows=1, Orientation=Vertical, Packaging=Bulk, Pitch=2.54mm, REACH SVHC=Unknown, RoHS=Compliant, Termination=Solder, Voltage Rating=250V
Q1: "No Description Available", Mfr_Name="ROHM Semiconductor", RefDes=RefDes, Type=Type
R1 R6: library part CMP-2002-05875-2, "RES SMD 10K OHM 0.1% 1/16W 0402", Manufacturer=Panasonic, Manufacturer Part Number=ERA-2AEB103X, Package=ERA2A, Power Rating=0.063W, Resistance=1.5kΩ, Temperature="-55°C to +155°C", Temperature Coefficient=25ppm/°C, Temperature Range High=+155°C, Temperature Range Low=-55°C, Tolerance=0.1%, Voltage Rating=50V, Automotive=Yes, Automotive Grade="Grade 0", Category=Res, ComponentLink2Description=Datasheet, ComponentLink2URL=https://industrial.panasonic.com/cdbs/www-data/pdf/RDM0000/AOA0000C307.pdf, Composition="Metal Film", Device Class L1="Passive Components", Device Class L2=Resistors, Device Class L3="Chip SMD Resistors", Digikey Description="RES SMD 10K OHM 0.1% 1/16W 0402", Footprint Url=https://industrial.panasonic.com/cdbs/www-data/pdf/RDM0000/DMM0000COL17.pdf, Height=0.4mm, Lead Free=Yes, Mouser Description="Thin Film Resistors - SMD 0402 1/16W 10Kohms", Octopart=https://octopart.com/era-2aeb103x-panasonic-9251377, RoHS=TRUE, Series=ERA
R2 R5: library part CMP-2002-05875-2, "RES SMD 10K OHM 0.1% 1/16W 0402", Manufacturer=Panasonic, Manufacturer Part Number=ERA-2AEB103X, Package=ERA2A, Power Rating=0.063W, Resistance=10kΩ, Temperature="-55°C to +155°C", Temperature Coefficient=25ppm/°C, Temperature Range High=+155°C, Temperature Range Low=-55°C, Tolerance=0.1%, Voltage Rating=50V, Automotive=Yes, Automotive Grade="Grade 0", Category=Res, ComponentLink2Description=Datasheet, ComponentLink2URL=https://industrial.panasonic.com/cdbs/www-data/pdf/RDM0000/AOA0000C307.pdf, Composition="Metal Film", Device Class L1="Passive Components", Device Class L2=Resistors, Device Class L3="Chip SMD Resistors", Digikey Description="RES SMD 10K OHM 0.1% 1/16W 0402", Footprint Url=https://industrial.panasonic.com/cdbs/www-data/pdf/RDM0000/DMM0000COL17.pdf, Height=0.4mm, Lead Free=Yes, Mouser Description="Thin Film Resistors - SMD 0402 1/16W 10Kohms", Octopart=https://octopart.com/era-2aeb103x-panasonic-9251377, RoHS=TRUE, Series=ERA
R3: library part CMP-00030-22249381-1, "RCA06031K00FKEA SMD Chip Resistor, 1 kOhm, ± 1%, 100 mW, 0603 [1608 Metric], Thick Film, Anti-Sulfur", Case Code (Imperial)=0603, Case Code (Metric)=1608, Max Operating Temperature=155°C, Max Power Dissipation=100mW, Min Operating Temperature=-55°C, Resistance=1kΩ, Temperature Coefficient=100ppm/°C, Tolerance=1%, Voltage Rating=75V, Case/Package=0603, Composition="Thick Film", Contact Plating=Tin, Depth=850µm, Features="Anti-Sulfur, Automotive AEC-Q200", Height=508µm, Length=1.55mm, Military Standard=Not, Mount="Surface Mount", NexarPartId=22249381, Number of Terminations=2, Packaging="Cut Tape", Power Rating=100mW, Radiation Hardening=No, REACH SVHC="No SVHC", RoHS=Compliant, Schedule B=8533210045, Voltage Rating (DC)=75V, Width=838.2µm
R4: library part CMP-04015-074272-1, "100kΩ ±1% 0.1W Chip Resistor 0603 Thick Film AEC-Q200 Qualified", Case Code (Imperial)=0603, Case Code (Metric)=1608, Max Operating Temperature=155°C, Min Operating Temperature=-55°C, Package Quantity=5000, Power Rating=100mW, Resistance=100kR, Temperature Coefficient=100ppm/°C, Tolerance=1%, Voltage Rating=50V, Case/Package=0603, Height=0.45mm, Lead Free="Contains Lead", Length=1.6mm, Packaging="Tape and Reel", Series=RK73H, Termination=SMD/SMT, Width=0.8mm
R7: library part CMP-2002-00121-1, Manufacturer="Vishay Dale", Part Number=CRCW04025K60FKED
R8: library part CMP-2002-08427-1, Manufacturer="Vishay Dale", Part Number=CRCW0402270RFKED
SW1: library part CMP-03790-42203485-1, "1977223-1 Pushbutton Switch, SPST, Momentary, 0.05A, 24VDC, Solder Terminal, Panel Mount", Case/Package=SMD/SMT, Contact Current Rating=50mA, Manufacturer Lifecycle Status=ACTIVE, Max Operating Temperature=105°C, Max Voltage Rating (DC)=24V, Min Operating Temperature=-40°C, Actuator Length=700µm, Actuator Material="Nylon, Polyamide", Contact Plating=Silver, Current Rating=50mA, ELV=Compliant, Height=4.3mm, Housing Material=Polyphenylene, Illumination Type="Illuminated, Non-Illuminated", Lifecycle Status=Production, Material=Polyamide, Mechanical Life=1Mcycles, Mount="Surface Mount", NexarPartId=42203485, Number of Positions=2, Packaging=Bulk, Radiation Hardening=No, REACH SVHC="No SVHC", RoHS=Compliant, Switch Function=Off-Mom, Switch Travel=250µm, Termination="Gull Wing", Throw Configuration=SPST, Type=Switch, Voltage Rating (DC)=24V
U1: library part CMP-0237-00215-3, "ARM Cortex-M3 32-bit MCU, 64 KB Flash, 20 KB Internal RAM, 37 I/Os, 48-pin LQFP, -40 to 85 degC, Tray", I/Os (High Current)=37, Operating Frequency(F) (Processor speed) (MHz)=72, Supply Voltage(Vcc) min (V)=2, A/D Converter="2x12-bit (10 Channel)", ComponentLink1Description="Manufacturer URL", ComponentLink1URL=http://www.st.com/web/en/home.html, ComponentLink2Description=Datasheet, ComponentLink2URL=http://www.st.com/st-web-ui/static/active/en/resource/technical/document/datasheet/CD00161566.pdf, ComponentLink3Description="Package Specification", ComponentLink3URL=http://www.st.com/st-web-ui/static/active/en/resource/technical/document/datasheet/DM00058181.pdf, Core="ARM Cortex-M3", DatasheetVersion="Rev. 16", FLASH Size (Prog) (kB)=64, Internal RAM Size (kB)=20, Mounting Technology="Surface Mount", PackageDescription="48-Pin Low Profile Quad Flat Package, 7 x 7 mm Body, 0.5 mm Pitch", PackageReference=LQFP48, PackageVersion="Rev. 6, 06/2013", Packing=Tray, PartNumber=STM32F103C8T6
U2: library part CMP-209535-000001-1, "LDO Voltage Regulators 1A, 3.3V", Dropout Voltage=1.1V, Manufacturer="Advanced Monolithic Systems", Max Junction Temp=+125°C, Max Power Dissipation=1.2W, Max Supply Voltage=15V, Nominal Supply Current=5mA, Output Current=1A, Output Voltage=3.3V, Package=AMS1117, Temperature="-40°C to +125°C", Temperature Range Low=-40°C, Automotive=No, Category=IC, ComponentLink2Description=Datasheet, ComponentLink2URL=http://www.advanced-monolithic.com/pdf/ds1117.pdf, Device Class L1="Integrated Circuits (ICs)", Device Class L2="Power Management ICs", Device Class L3="Voltage Regulators - Linear", Height=1.8mm, Ipc Land Pattern Name=SOT229P700X180-4, Lead Free=Yes, Manufacturer Part Number=AMS1117-3.3, Number Of Outputs=1, Octopart=https://octopart.com/ams1117-3.3-advanced+monolithic+systems-25899300, Output Type=Fixed, RoHS=TRUE, Standoff Height=0.64mm, Temperature Range High=+125°C
U3: library part CMP-2000-04960-2, "IC REG BUCK ADJUSTABLE 3A 8SOPWR", Manufacturer="Texas Instruments", Max Junction Temp=+125°C, Max Supply Voltage=36V, Min Supply Voltage=5.5V, Nominal Supply Current=3mA, Output Current=3A, Output Voltage=1.23-31V, Package=DDA0008J, Switching Frequency=500kHz, Temperature="-40°C to +125°C", Temperature Range Low=-40°C, Automotive=No, Category=IC, ComponentLink2Description=Datasheet, ComponentLink2URL=http://www.ti.com/lit/ds/symlink/tps5431.pdf, Device Class L1="Integrated Circuits (ICs)", Device Class L2="Power Management ICs", Device Class L3="Voltage Regulators - Switching", Digikey Description="IC REG BUCK ADJUSTABLE 3A 8SOPWR", Height=1.7mm, Lead Free=Yes, Manufacturer Part Number=TPS5430DDA, Max Duty Cycle=89%, Mouser Description="Voltage Regulators - Switching Regulators 5.5 to 36V Input 3A Step Dwn Converter", Number Of Outputs=1, Octopart=https://octopart.com/tps5430dda-texas+instruments-589977, Output Type=AdjustableProgrammable, RoHS=TRUE, Standoff Height=0mm, Switching Topology=Buck, Temperature Range High=+125°C
USB: library part CMP-1502-03252-3, Contact Resistance=30mΩ, Current Rating=3A, Insulation Resistance=1GΩ, Max Operating Temperature=85°C, Min Operating Temperature=-40°C, Operating Supply Voltage=30V, Connector Type=USB, Contact Material=Gold, Contact Plating=Gold, Features=Shielded, Gender=Receptacle, Height=2.86mm, Lead Free="Lead Free", Mount="Horizontal, Surface Mount", NexarPartId=52645113, Number of Contacts=5, Number of Pins=5, Orientation=Horizontal, Packaging="Tape and Reel", REACH SVHC=Unknown, RoHS=Compliant, Termination=SMD/SMT, USB Standard="USB 2.0", Voltage Rating=30V
Y1: library part CMP-03913-116855783-1, "830108288709 WE-XTAL Quartz Crystal", Max Operating Temperature=105°C, Min Operating Temperature=-40°C, Frequency=16MHz, Height=500µm, Length=2mm, NexarPartId=116855783, Width=1.6mm

## Free pads (board coordinates)
  round 3.2 hole 2.5: MH(44,82) MH(44,111) MH(82,82) MH(82,111)

## Via types
v1: diameter 0.7, hole 0.3, Top Layer to Bottom Layer, 26 vias
v2: diameter 0.5, hole 0.2, Top Layer to Bottom Layer, 8 vias

## Nets (pads, with @x,y where several pads share a name; then routed paths per layer and width w, separated by ;. In a path a pad name is that pad's centre, name@x,y a point inside that pad or via, vN(x,y) a via of type N, cw(c..) or ccw(c..) an arc to the next point about the centre after c; other vN are vias at no path point)
3V3A: C11.1 C12.1 FB1.1 U1.9 | length 7
  Top Layer w0.254: 61.6,100.6 62.11,101.11 63.029,101.11 U1.9
  Top Layer w0.3: 61.4,100.4 61.6,100.6
  Top Layer w0.4: 61.3,100.3 61.4,100.4
  Top Layer w0.5: FB1.1 61.079,95.512 C12.1 C11.1 61.079,100.079 61.3,100.3
+3V3: C3.1 C4.1 C5.1 C9.1 C10.1 C13.1 C15.2 C18.1 FB1.2 L1.2 P1.1 R1.1 R5.1 R6.1 U1.1 U1.24 U1.36 U1.48 U2.2 | length 129.6
  Top Layer w0.254: 62,105.1 62.012,105.112 U1.1 ; 64.3,107.4 64.304,107.396 U1.48 U1.48 ; 69.8,97.1 69.806,97.106 U1.24 ; U1.36 72.112,105.112 72.3,105.3 ; C18.1@74.55,90.65 74.699,90.5 v1(75.9,90.5) ; v1(75.8,96.6) 75.8,96.237 R1.1@77.025,95.012 ; R1.1 R1.1@77.025,95.012 ; P1.1 77.025,96.215 R1.1@77.025,95.012
  Top Layer w0.3: C10.1@58.7,106.4 C10.1 ; C10.1@58.7,106.701 R6.1 ; 61.8,105.1 62,105.1 ; 64.3,107.4 64.3,107.7 ; 69.8,96.9 69.8,97.1 ; U2.2 71.221,90 71.521,89.7 73.4,89.7 C18.1@74.45,90.75 ; 72.3,105.3 72.5,105.5
  Top Layer w0.4: C15.2 44.827,86.612 45.827,87.612 45.827,89.23 50.943,94.346 50.943,95.678 52.191,96.926 R5.1 53.771,98.029 56.946,94.854 58.09,94.854 58.324,95.088 58.324,95.154 C13.1 FB1.2 60.251,95.504 60.338,95.418 60.338,95.094 60.614,94.818 62.678,94.818 62.96,95.1 68.75,95.1 69.8,96.15 69.8,96.9 ; v1(56.8,107.3) 58.001,107.3 58.247,107.054 58.347,107.054 58.7,106.701 C10.1 ; R6.1 58.712,108.288 59.025,108.6 63.5,108.6 ; v1(59.4,93.5) 60.23,94.33 60.23,95.094 ; 60.5,105.7 60.716,105.7 60.766,105.65 60.95,105.65 61.05,105.55 61.116,105.55 61.566,105.1 61.8,105.1 ; v1(62.9,92.6) 65.548,92.6 68.148,90 U2.2 ; v1(63.1,109.4) 63.157,109.343 63.157,108.943 63.5,108.6 ; 64.3,107.7 C3.1@64.3,108.555 ; C3.1 63.5,108.6 ; 72.5,105.5 72.65,105.65 C4.1@73.15,105.65 ; v1(73,106.8) 73.2,106.6 C4.1
  Top Layer w0.5: C10.1@58.7,106.4 58.901,106.199 60.001,106.199 60.5,105.7
  Top Layer w1: L1.2 42.654,84.939 44.327,86.612 C15.2
  Bottom Layer w0.254: v1(75.8,96.6) 74.4,95.2 74.4,94.1 75.9,92.6 v1(75.9,90.5)
  Bottom Layer w0.4: v1(56.8,107.3) 56.3,106.8 56.3,101.541 58.5,99.341 58.5,94.4 v1(59.4,93.5) 60,93.5 60.5,93 62.5,93 v1(62.9,92.6) ; v1(63.1,109.4) 63.1,109.766 63.334,110 69.8,110 v1(73,106.8)
+12: C16.1 J2.P Q1.1 Q1.2 Q1.5 Q1.6 | length 12.8
  Top Layer w0.8: J2.P 39.506,102.625 41.102,102.625 41.493,103.016 Q1.1 ; Q1.5 Q1.6 Q1.1 ; C16.1 44.098,100.213 44.098,102.987 Q1.2 Q1.1
GND: C1.2 C2.2 C3.2 C4.2 C5.2 C6.1 C7.2 C8.2 C9.2 C10.2 C11.2 C12.2 C13.2 C15.1 C16.2 C17.2 C18.2 D1.2 DS1.2 J2.N P1.4 Q1.3 R2.2 R4.1 R8.1 U1.8 U1.23 U1.35 U1.47 U2.1 U3.6 U3.9 USB.5 Y1.2 Y1.4 | length 201
  Top Layer w0.254: 61.7,101.5 61.812,101.612 U1.8 ; U1.47 64.808,106.389 64.808,107.208 65.1,107.5 ; R2.2 74.132,109.347 74.379,109.1 v1(74.5,109.1) ; 69.1,97.1 69.306,97.306 U1.23 ; U1.35 72.388,104.612 ; v1(76.3,97.9) 76.3,98.751 76.949,99.4 80.728,99.4 80.877,99.251 80.877,93.199 80.451,92.773 79.998,92.773 79.525,92.3 USB.5
  Top Layer w0.3: 61.4,101.5 61.7,101.5 ; 65.1,107.5 65.1,107.9 65.2,108 ; 68.9,96.9 69.1,97.1 ; 72.388,104.612 72.7,104.3 72.9,104.3
  Top Layer w0.4: Q1.3 47.9,103.016 48.2,102.716 v2(48.2,102.459) 48.2,102.134 46.1,100.034 v1(46.1,97.2) ; U3.6 50.785,103.774 v2(50.8,103.759) ; v2(52.1,102.459) 52.1,102.84 52.512,103.252 R8.1 ; v1(54.587,98.477) 54.587,98.413 v1(56.4,96.6) 57.224,95.776 57.402,95.776 C13.2 57.8,95.63 Y1.2 ; v1(56,100) 56,99.919 56.288,99.631 56.288,99.088 56.475,98.9 Y1.4 ; C7.2@56.65,101.55 56.55,101.55 56.55,101.105 56.326,100.881 56.826,100.381 56.826,99.674 56.725,99.573 Y1.4@56.725,99.088 ; Y1.2@57.806,97.938 60.059,97.938 C12.2 C11.2 ; C11.2@59.976,99.887 59.961,99.872 59.628,99.872 58.8,100.7 v1(58.8,101.6) 60.5,101.6 C6.1 ; C11.2@60.129,100.048 60.9,100.819 C6.1@60.9,101.3 ; C6.1@60.9,101.5 61.4,101.5 ; 65.2,108 65.22,108.02 C3.2@65.22,108.535 ; v1(67.1,96.3) 67.117,96.283 68.833,96.283 C5.2 68.9,96.316 68.9,96.9 ; v1(72.3,90.9) 73.301,91.901 C18.2 ; v1(72.9,88.7) 71.465,88.7 71.231,88.466 71.231,87.941 U2.1 72.01,87.71 72.034,87.733 74.858,87.733 C17.2 ; 72.9,104.3 73.15,104.55 73.15,104.85 C4.2 75.119,104.9 75.319,105.1 v1(75.4,105.1)
  Top Layer w0.5: v1(41.5,98.8) 42.2,98.1 43.647,98.1 43.705,98.158 43.94,98.158 C16.2@44.196,98.414 ; C16.2 C16.2@44.196,98.414 ; C15.1 45.2,93.335 v1(45.2,94.7) ; v1(46.1,97.2) 46.062,97.238 45.372,97.238 C16.2@44.196,98.414 ; U3.6 50.785,108.385 DS1.2 53.1,109.2 ; D1.2 53.693,95.362 55.455,93.6 v1(55.5,93.6) ; v1(53.6,85.2) 53.628,85.172 53.628,84.672 54.353,83.947 R4.1 55.373,83.819 55.373,83.227 C1.2 57.107,81.5 57.4,81.207 57.4,81.064 57.664,80.8 60.336,80.8 60.6,81.064 60.6,81.207 60.893,81.5 C2.2 ; C10.2@58.7,104.767 57.397,104.767 53.632,108.532 53.632,108.668 53.1,109.2 ; v1(58.7,105) 58.7,104.901 59.003,104.597 59.006,104.597 59.403,104.2 60.6,104.2 C9.2 ; C3.2 65.956,108.6 66.366,109.01 66.465,109.01 R2.2 66.802,109.593 65.695,110.7 54.464,110.7 53.632,109.868 53.632,109.732 53.1,109.2
  Top Layer w1: J2.N 38.541,106.54 40.56,106.54 v1(41.5,105.6)
  Bottom Layer w0.254: v1(72.3,90.9) 72.3,91.257 72.3,94.6 74.977,97.277 75.677,97.277 v1(76.3,97.9) 75.4,98.8 v1(75.4,105.1) ; v1(74.5,109.1) 75.8,107.8 75.8,105.5
  Bottom Layer w0.4: v1(54.587,98.477) 54.627,98.517 54.627,99.427 55.2,100 v1(56,100) ; v1(55.5,93.6) 55.5,95.7 v1(56.4,96.6) ; v1(58.7,105) 58.7,104.919 58.4,104.619 58.4,102 v1(58.8,101.6) ; v1(67.1,96.3) 67.1,94.2 70.043,91.257 72.3,91.257 ; v1@72.4,90.9 72.4,90.2 72.9,89.7 v1(72.9,88.7) ; v1(75.4,105.1) 75.8,105.5 77.083,105.5 77.393,105.81 P1.4
  Bottom Layer w0.5: v1(45.2,94.7) 46.1,95.6 v1(46.1,97.2) ; v1(53.6,85.2) 53.6,91.7 v1(55.5,93.6)
  Bottom Layer w1: v1(41.5,98.8) v1(41.5,105.6)
  other v2: 49.5,102.459 50.8,102.459 48.2,103.759 49.5,103.759 52.1,103.759
MCU_PB13_GPIO: SW1.1 SW1.2 U1.26 | length 29
  Top Layer w0.254: U1.26 72.288,100.112 72.6,99.8
  Top Layer w0.3: 72.6,97.9 72.6,99.8
  Top Layer w0.6: SW1.2@60.35,91.5 62.95,94.1 70.7,94.1 72.6,96 72.6,97.9
  Top Layer w1: SW1.1 SW1.2 SW1.2@60.35,91.5
MCU_SWCLK: P1.3 U1.37 | length 12.4
  Top Layer w0.254: U1.37 69.806,107.651 69.955,107.8 74.2,107.8 78.73,103.27 P1.3
MCU_SWDIO: P1.2 U1.34 | length 9.3
  Top Layer w0.254: U1.34 72.176,104.112 72.588,103.7 75.4,103.7 78.112,100.988 78.742,100.988 P1.2
MCU_USB_D_N: U1.32 USB.2 | length 17.2
  Top Layer w0.26: U1.32 71.874,103.112 73.489,101.498 73.489,98.357 74.1,97.745 74.1,95.898 76.587,93.411 76.587,92.223 77.18,91.63 77.18,91.192 77.928,90.444 79.006,90.444 USB.2
MCU_USB_D_P: R1.2 U1.33 USB.3 | length 17.3
  Top Layer w0.26: U1.33 71.721,103.612 71.758,103.575 72.066,103.575 73.952,101.69 73.952,98.548 74.563,97.937 74.563,96.337 75.78,95.12 75.892,95.12 75.956,95.056 75.956,94.944 77.05,93.85 77.05,92.415 77.643,91.822 77.643,91.384 78.12,90.907 79.007,90.907 USB.3
NetC1_1: C1.1 R3.1 R4.2 SW1.3 SW1.4 | length 15.7
  Top Layer w0.3: SW1.3 53.571,87 56.596,83.975 R4.2 R3.1 58.813,84.072 60,85.259 SW1.4 ; R4.2@56.596,83.919 58,82.514 C1.1@58,81.496
NetC2_1: C2.1 R3.2 | length 2.4
  Top Layer w0.3: C2.1@59.96,81.661 60.313,82.014 R3.2
NetC6_2: C6.2 U1.7 | length 2.3
  Top Layer w0.254: 61.8,102.2 61.888,102.112 U1.7
  Top Layer w0.3: 61.583,102.383 61.766,102.2 61.8,102.2
  Top Layer w0.4: C6.2 60.85,102.35 61.55,102.35
NetC7_1: C7.1 U1.5 Y1.1 | length 12.6
  Top Layer w0.254: C7.1@55.4,101.687 55.4,102.3 55.9,102.3 56.714,103.114 60.01,103.114 60.227,103.331 61.956,103.331 62.173,103.114 U1.5@62.383,103.114 ; C7.1 55.2,101.3 55.2,100.7 55.2,98.938 55.952,98.186 56.265,98.186 Y1.1
NetC8_1: C8.1 U1.6 Y1.3 | length 8.7
  Top Layer w0.254: Y1.3 57.6,99.1 57.6,101.4 C8.1 58.6,102.4 59.3,102.4 59.56,102.66 60.198,102.66 60.415,102.877 61.768,102.877 61.985,102.66 62.015,102.66 62.061,102.614 63.029,102.614 U1.6
NetC14_1: C14.1 U3.1 | length 2.9
  Top Layer w0.4: U3.1 48.245,99.934 49.465,98.714 49.465,98.079 C14.1
NetC14_2: C14.2 D1.1 L1.1 U3.8 | length 28.4
  Top Layer w0.4: v1(46.7,104.8) 46.781,104.8 47.579,105.598 48.145,105.598 48.245,105.698 U3.8 ; v1(47.3,98.7) 47.355,98.645 47.899,98.645 48.565,97.979 48.565,97.54 49.293,96.812 D1.1
  Top Layer w1: L1.1 35.921,94.639 37.382,96.1 48.155,96.1 48.893,95.362 D1.1
  Bottom Layer w0.4: v1(46.7,104.8) 46.7,99.381 47.3,98.781 v1(47.3,98.7)
NetDS1_1: DS1.1 R6.2 | length 3.6
  Top Layer w0.5: DS1.1 58.588,109.2 R6.2
NetQ1_4: Q1.4 U3.7 | length 5.8
  Top Layer w0.5: Q1.4 46.276,105.772 47.538,107.034 48.765,107.034 49.515,106.284 U3.7
NetR2_1: R2.1 U1.44 | length 2.1
  Top Layer w0.254: U1.44 66.306,107.839 66.79,108.322 R2.1
NetR5_2: R5.2 R7.2 U3.4 | length 4.7
  Top Layer w0.254: U3.4 52.055,100.427 52.228,100.6 R7.2
  Top Layer w0.4: R5.2 51.203,98.066 51.203,98.183 52.055,99.034 U3.4
NetR7_1: R7.1 R8.2 | length 4.2
  Top Layer w0.254: R7.1 53.99,101.49 53.99,101.79 55.1,102.9 55.1,103.8 54.846,104.054 54.158,104.054 R8.2
VBUS: C17.1 U2.3 USB.1 | length 14.5
  Top Layer w0.4: U2.3 72.102,92.29 72.965,93.153 75.419,93.153 76.034,92.537 76.034,92.026 76.65,91.411 76.65,90.55 78.1,89.1 77.958,88.958 C17.1 ; 78.087,89.112 78.675,89.7 USB.1
pads on no net: J2.S1 J2.S2 U1.2 U1.3 U1.4 U1.10 U1.11 U1.12 U1.13 U1.14 U1.15 U1.16 U1.17 U1.18 U1.19 U1.20 U1.21 U1.22 U1.25 U1.27 U1.28 U1.29 U1.30 U1.31 U1.38 U1.39 U1.40 U1.41 U1.42 U1.43 U1.45 U1.46 U2.4 U3.2 U3.3 U3.5 USB.4 USB.MH1 USB.MH2 USB.Shell

## Polygon pours and split planes (outlines as drawn)
GND on Int2 (GND) "GND_L03_P006" (solid, pour order 6): 26.775,111.77 27.758,112.752 80.765,112.752 80.817,112.804 83.196,110.425 83.92,110.425 83.92,80.379 83.455,79.913 83.299,80.069 28.275,80.069 26.775,81.568 26.827,81.62 26.827,111.252
GND on Int1 (GND) "GND_L02_P003" (solid, pour order 3): 28.085,112.687 82.854,112.687 83.948,111.592 83.948,80.789 83.1,79.941 28.435,79.941 26.731,81.645 26.731,111.576 27.125,111.97 27.238,111.97

## Silkscreen, mask and mechanical layers (free items; w line width, h text height)
Mechanical 1:
  lines w0.254: 26,82.27 ccw(c29.066,82.27) 26.898,80.102 27.102,79.898 ccw(c29.27,82.066) 29.27,79 81.73,79 ccw(c81.73,82.066) 83.898,79.898 84.102,80.102 ccw(c81.934,82.27) 85,82.27 85,110.73 ccw(c81.934,110.73) 84.102,112.898 83.898,113.102 ccw(c81.73,110.934) 81.73,114 42,114 29.27,114 ccw(c29.27,110.934) 27.102,113.102 26.898,112.898 ccw(c29.066,110.73) 26,110.73 26,109.73 26,82.27

## Text inside footprints (layer, text, board x,y; h text height)
Q1: Top 3D Body "*" at 43.917,103.556 h1.27 r90; Top Overlay "*" at 42.318,102.056 h1.27 r90
USB: Mechanical 2 "PCB Edge" at 85.3,89.7 h0.41 r90